# Altium PCB SewingAutoExt.PcbDoc
Units mm, origin at the board's own origin, x right, y up, seen from the top; angles counter-clockwise.
Board outline 60 x 53.47 mm, 2 copper layers (Top Layer, Bottom Layer); 58 components, 69 nets, 189 pads, 31 vias.
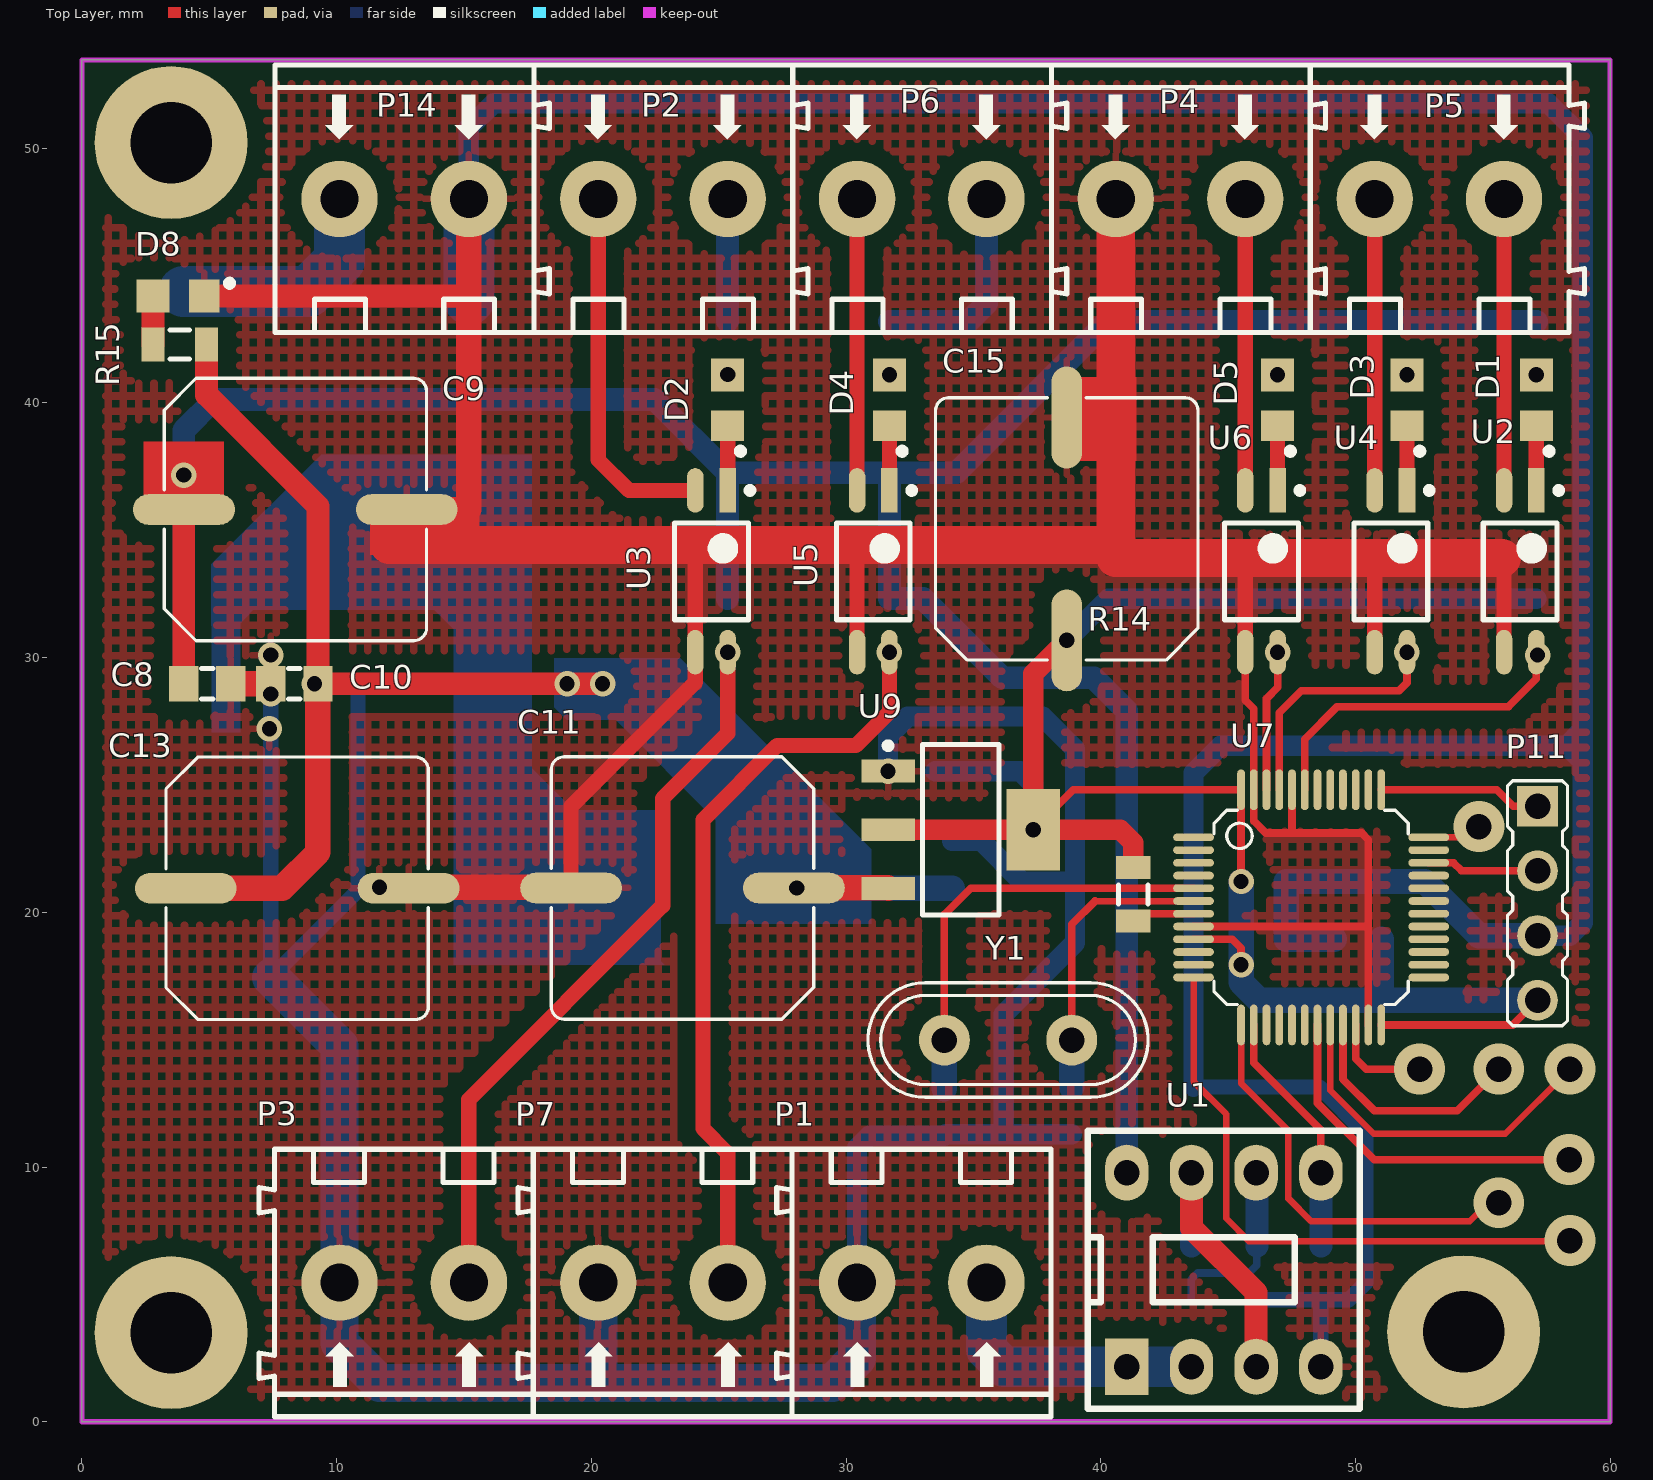
[diagram p0: Top Layer view]
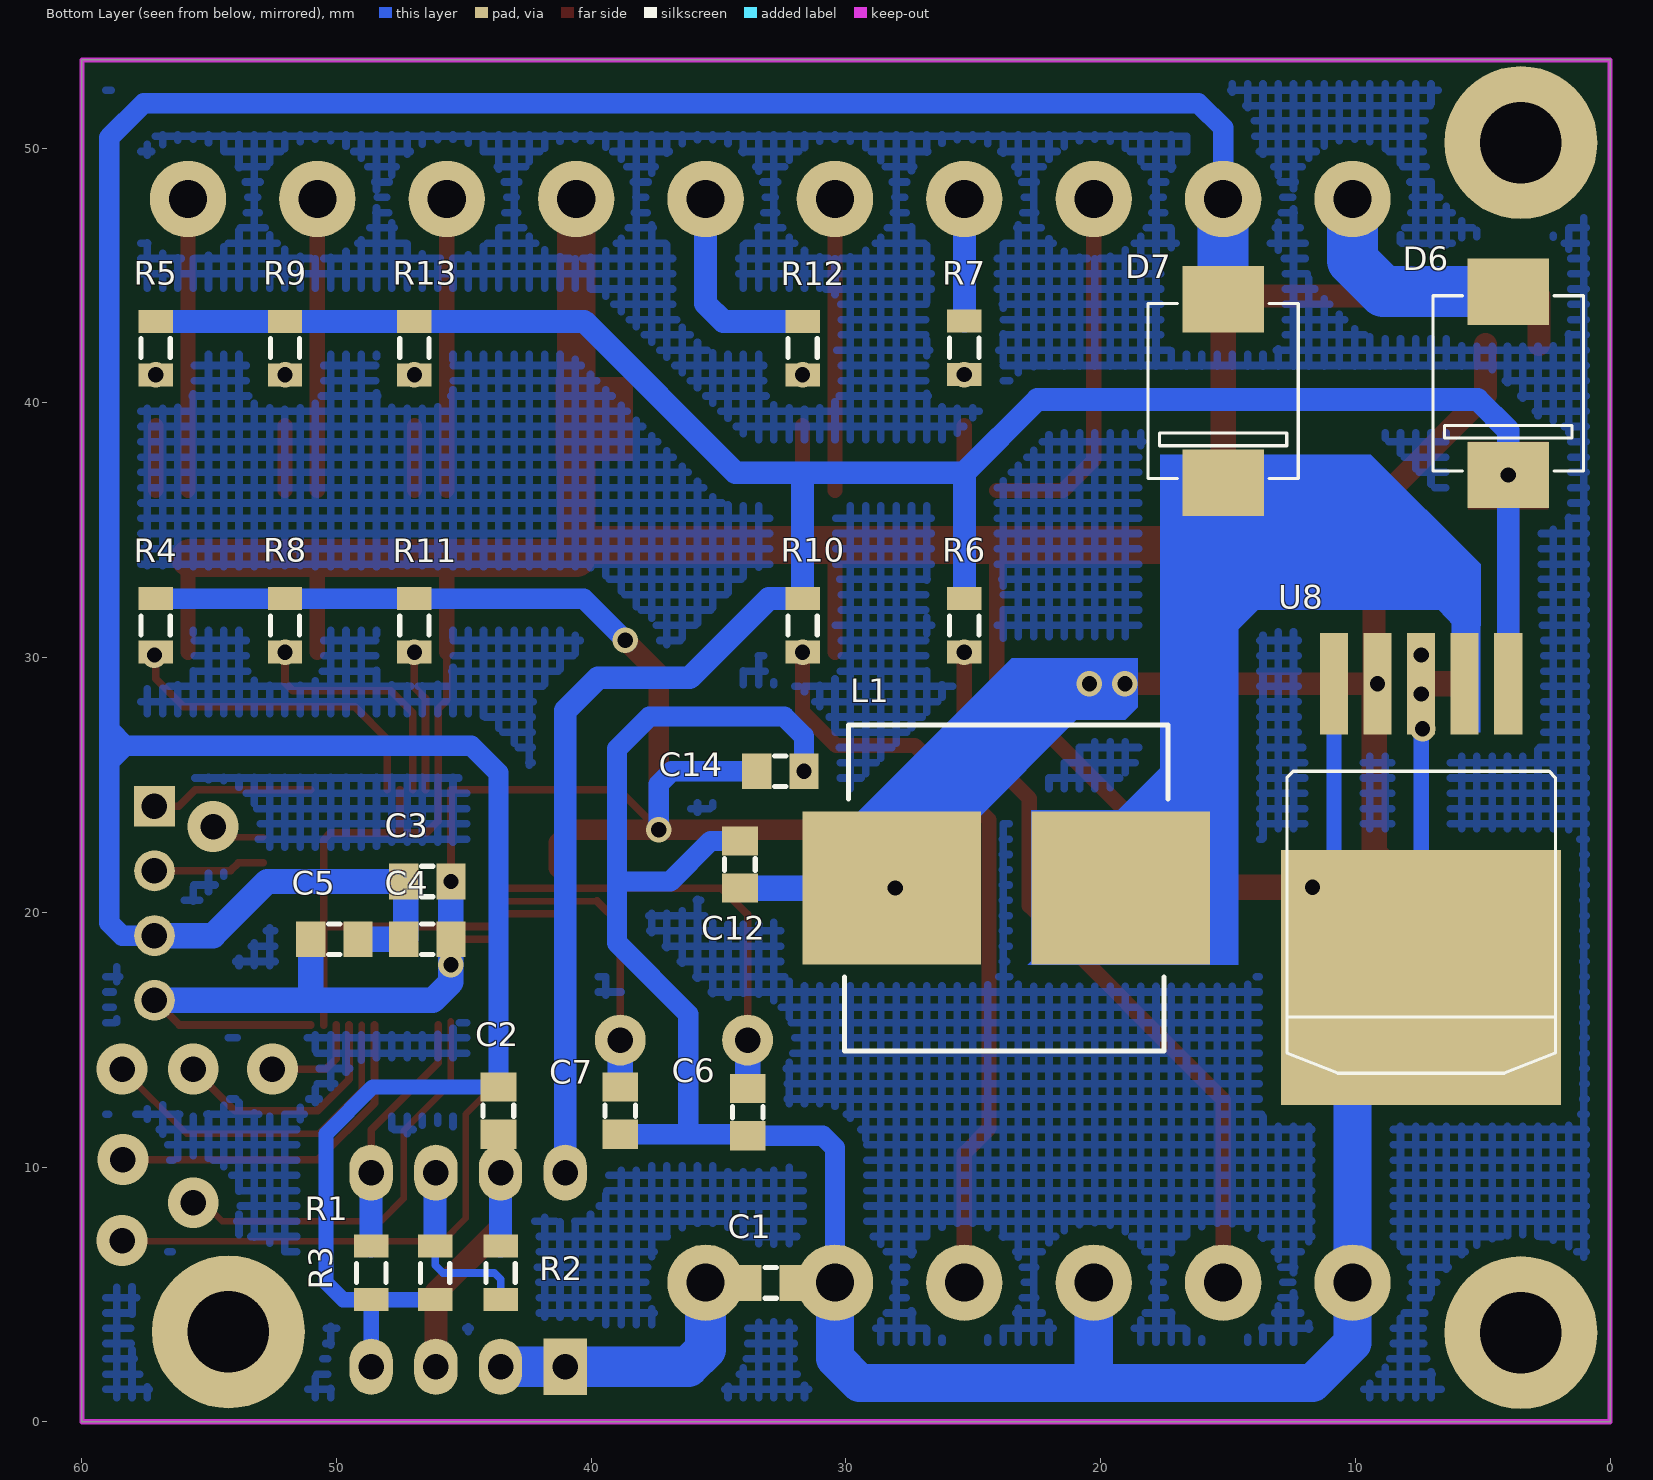
[diagram p1: Bottom Layer view, seen from below]
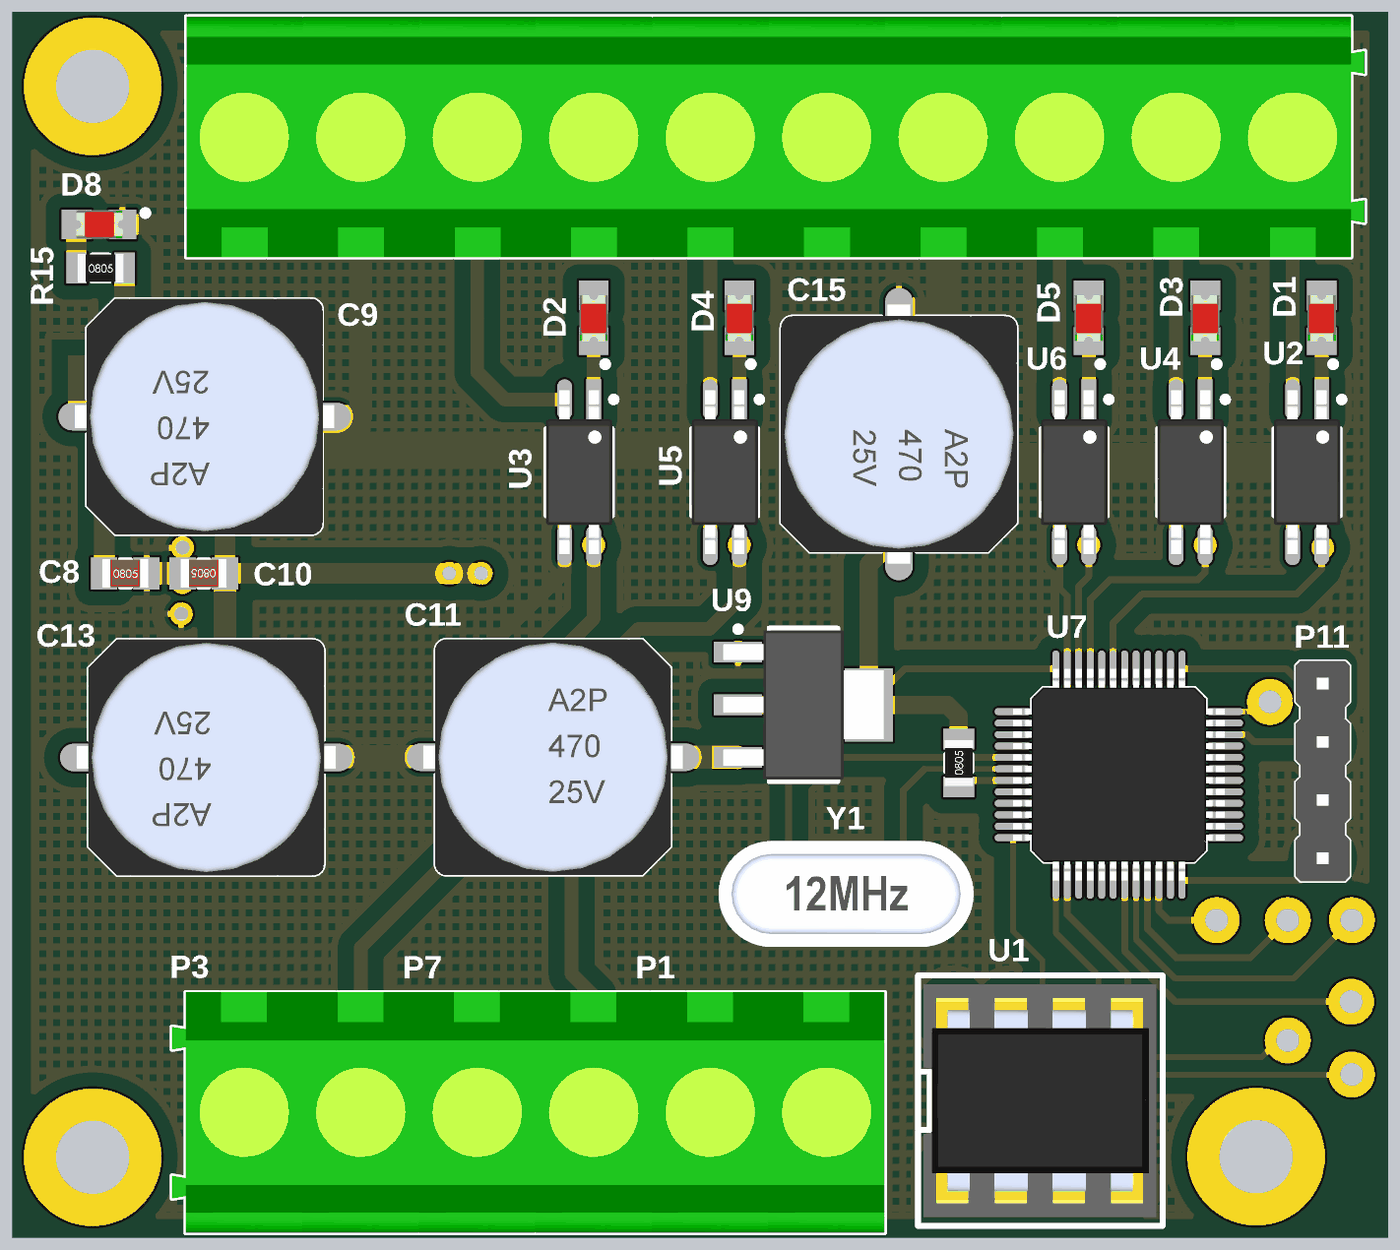
[diagram p2: 3D render of the assembled board from above, using the file's embedded part models]
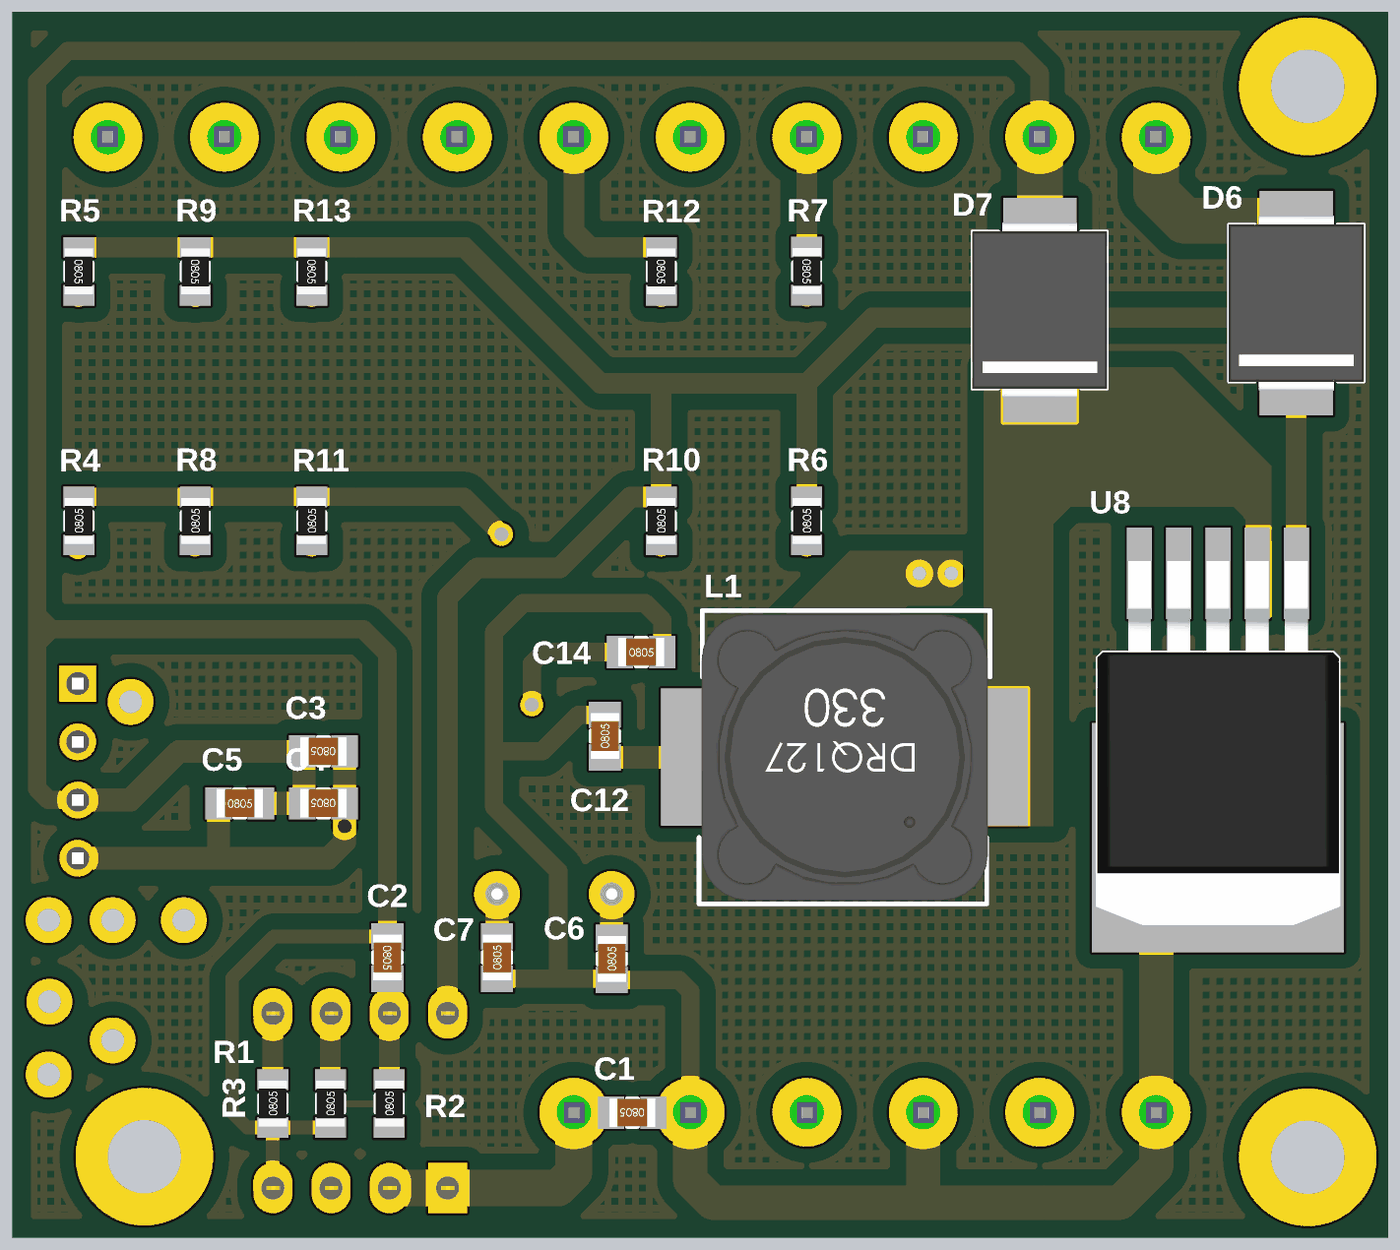
[diagram p3: 3D render of the assembled board from below, using the file's embedded part models]

## Layer stack, top to bottom
Top Solder: solder mask 0.0102, Solder Resist, Dk 3.5
Top Layer: signal copper 0.0356
Dielectric 1: dielectric 0.32, FR-4, Dk 4.8
Bottom Layer: signal copper 0.0356
Bottom Solder: solder mask 0.0102, Solder Resist, Dk 3.5

## Board outline
0,0 60,0 60,53.467 0,53.467

## Design rules (kind name [scope] priority, off if disabled: settings)
Clearance [All] p1: gap=0.2 ignorepadtopadclearanceinfootprint=FALSE
ComponentClearance [All] p1 off: gap=0.254 collisioncheckmode=3 verticalgap=0.254 showdistances=FALSE
HoleSize [All] p1 off: absolutevalues=TRUE maxlimit=2.54 minlimit=0.025 maxpercent=80.000 minpercent=20.000
HoleToHoleClearance [All] p1 off: gap=0.254 allowstackedmicrovias=TRUE
LayerPairs [All] p1 off: enforce=TRUE
MinimumSolderMaskSliver [All] p1 off: minsoldermaskwidth=0.254
PolygonConnect [All] p1: connectstyle=Relief reliefconductorwidth=0.254 reliefentries=4 polygonreliefangle="90 Angle" airgapwidth=0.254
RoomDefinition DACAmplification [InComponentClass('DACAmplification')] p1: confinementstyle=ConfineIn formatcopy=TRUE lockcomponents=FALSE outline 0,53.467 60,53.467 60,0 0,0
RoomDefinition PowerSupply [InComponentClass('PowerSupply')] p2: confinementstyle=ConfineIn formatcopy=TRUE lockcomponents=FALSE outline 0,0 60,0 60,53.467 0,53.467
RoomDefinition InputLevelShifter [InComponentClass('InputLevelShifter')] p3: confinementstyle=ConfineIn formatcopy=TRUE lockcomponents=FALSE outline 0,0 60,0 60,53.467 0,53.467
RoomDefinition MCU [InComponentClass('MCU')] p4: confinementstyle=ConfineIn formatcopy=TRUE lockcomponents=FALSE outline 0,0 60,0 60,53.467 0,53.467
RoutingVias [All] p1: holewidth=0.6 width=1 viastyle="Through Hole" minholewidth=0.6 minwidth=1 maxholewidth=0.6 maxwidth=1
SilkToSilkClearance [All] p1 off: silktosilkclearance=0.254
SilkToSolderMaskClearance [IsPad] p1 off: minsilkscreentomaskgap=0.254 clearancetoexposedcopper=TRUE
SolderMaskExpansion [All] p1: expansion=0.102
Width [All] p1: maxlimit=2 minlimit=0.254 preferedwidth=1
23 further rules are at their usual default settings.

## Classes and differential pairs
component class PowerSupply: C8 C9 C10 C11 C12 C13 C14 C15 D6 D7 D8 L1 P14 R15 U8 U9
component class MCU: C3 C4 C5 C6 C7 P11 R14 U7 Y1
component class InputLevelShifter: D1 D2 D3 D4 D5 P2 P3 P4 P5 P6 P7 R4 R5 R6 R7 R8 R9 R10 R11 R12 R13 U2 U3 U4 U5 U6
component class DACAmplification: C1 C2 P1 R1 R2 R3 U1

## Components (designator, comment, footprint, x,y, rotation, side; value= is the part's Value field where it differs from the comment)
C1 "104" C-0805 32.96,5.447 r0 bottom value=100nF
C2 "104" C-0805 43.644,12.216 r270 bottom value=100nF
C3 "104" C-0805 46.435,21.209 r0 bottom value=100nF
C4 "104" C-0805 46.435,18.943 r0 bottom value=100nF
C5 "104" C-0805 50.085,18.943 r180 bottom value=100nF
C6 "22" C-0805 33.862,12.156 r90 bottom value=22pF
C7 "22" C-0805 38.862,12.216 r90 bottom value=22pF
C8 "104" C-0805 4.925,28.974 r0 top value=100nF
C9 "330uF/50V" C-ALU-10x10.2mm 8.382,35.814 r270 top value=330uF
C10 "104" C-0805 8.345,28.974 r180 top value=100nF
C11 "330uF/50V" C-ALU-10x10.2mm 23.581,20.955 r90 top value=330uF
C12 "104" C-0805 34.163,21.876 r90 bottom value=100nF
C13 "330uF/50V" C-ALU-10x10.2mm 8.453,20.943 r270 top value=330uF
C14 "104" C-0805 32.575,25.541 r180 bottom value=100nF
C15 "330uF/50V" C-ALU-10x10.2mm 38.668,35.052 r0 top value=330uF
D1 "SMD0805-RED" LED-0805 57.104,40.102 r90 top value=StatusLed
D2 "SMD0805-RED" LED-0805 25.354,40.102 r90 top value=StatusLed
D3 "SMD0805-RED" LED-0805 52.024,40.102 r90 top value=StatusLed
D4 "SMD0805-RED" LED-0805 31.704,40.102 r90 top value=StatusLed
D5 "SMD0805-RED" LED-0805 46.944,40.102 r90 top value=StatusLed
D6 "SS54-SMA" D-DO214-AB 4,40.767 r270 bottom value=SS54
D7 "SS54-SMA" D-DO214-AB 15.194,40.465 r270 bottom value=SS54
D8 "SMD0805-RED" LED-0805 3.797,44.196 r180 top value=PowerLed
L1 "100mH/3A" L-SMD-12.5x12.5 23.708,20.955 r0 bottom value=100mH
P1 "KF128-2P" TER-KF128-2P 32.96,5.447 r0 top value="DAC OUT"
P2 "KF128-2P" TER-KF128-2P 22.828,48.02 r180 top value="Encoder IN"
P3 "KF128-2P" TER-KF128-2P 12.64,5.447 r0 top value="Encoder OUT"
P4 "KF128-2P" TER-KF128-2P 43.148,48.02 r180 top value="PLC IN"
P5 "KF128-2P" TER-KF128-2P 53.308,48.02 r180 top value="PLC IN"
P6 "KF128-2P" TER-KF128-2P 32.988,48.02 r180 top value="Encoder IN"
P7 "KF128-2P" TER-KF128-2P 22.8,5.447 r0 top value="Encoder OUT"
P11 "JP2.54-M-4P" JP2.54-M-1x04A 57.15,20.376 r270 top value=Programmer
P14 "KF128-2P" TER-KF128-2P 12.668,48.02 r180 top value="Power Supply"
R1 "1K" R-0805 46.13,5.842 r90 bottom
R2 "4K7" R-0805 43.561,5.842 r90 bottom
R3 "10K" R-0805 48.641,5.842 r90 bottom
R4 "4K7" R-0805 57.104,31.262 r90 bottom
R5 "6K8" R-0805 57.104,42.152 r270 bottom
R6 "10K" R-0805 25.354,31.262 r90 bottom
R7 "2K2" R-0805 25.354,42.162 r270 bottom
R8 "4K7" R-0805 52.024,31.262 r90 bottom
R9 "6K8" R-0805 52.024,42.152 r270 bottom
R10 "10K" R-0805 31.704,31.262 r90 bottom
R11 "4K7" R-0805 46.944,31.262 r90 bottom
R12 "2K2" R-0805 31.704,42.152 r270 bottom
R13 "6K8" R-0805 46.944,42.152 r270 bottom
R14 "10K" R-0805 41.275,20.701 r90 top
R15 "1K5" R-0805 3.846,42.291 r0 top
U1 "LM358" SK-DIP8-300 44.831,5.969 r0 top value=TL082
U2 "EL3H7" SSOP-4 56.469,33.387 r270 top
U3 "EL3H7" SSOP-4 24.719,33.387 r270 top
U4 "EL3H7" SSOP-4 51.389,33.387 r270 top
U5 "EL3H7" SSOP-4 31.069,33.387 r270 top
U6 "EL3H7" SSOP-4 46.309,33.387 r270 top
U7 "STM32F051C8" LQFP-48 48.26,20.193 r270 top
U8 "LM2576S-5" TO-263-5L 7.42,23.208 r0 bottom
U9 "LM1117-3.3" SOT-223-3 34.5,23.241 r0 top
Y1 "8MHz" XTAL-49S 36.362,14.986 r0 top

## Footprints (in the part's own frame and the unit in brackets; to place one, negate y for a bottom-side part, rotate by r counter-clockwise, add the part's x,y. Pads: shape width x height; smd on the part's side, far side on the other; paste and mask are expansions set on the pad)
C-0805 [mm] "Chip Capacitor, 2-Leads, Body 2.0x1.3mm, IPC Medium Density"
  rect 1.15x1.4 smd: 1(-0.925,0) 2(0.925,0)
  silkscreen extent -0.22,-0.6 0.23,0.6, body extent -1,-0.62 1,0.63, height 0.5
C-ALU-10x10.2mm [mm] "C-10x10.2mm"
  oval 1.2x4 smd: 1(0,-4.374) 2(0,4.374)
  silkscreen extent -5.15,-5.15 5.15,5.15, body extent -5.15,-5.65 5.15,5.65, height 10.01
D-DO214-AB [mm]
  rect 2.6x3.2 smd: 1(-3.6,0) 2(3.6,0)
  silkscreen extent -3.44,-2.95 3.44,2.95, body extent -3.82,-2.95 3.81,2.95, height 2.4
JP2.54-M-1x04A [mm] "Jump luoc duc, 2.54mm, thang,"
  rect 1.6x1.6 hole 1: 1(-3.79,0)
  round 1.6 hole 1: 2(-1.25,0) 3(1.29,0) 4(3.83,0)
  silkscreen extent -4.79,-1.18 4.83,1.17, body extent -4.79,-1.17 4.83,1.18, height 7.75
L-SMD-12.5x12.5 [mm] "DRQ127"
  rect 7x6 smd: 1(-4.5,0) 2(4.5,0)
  silkscreen extent -6.34,-6.4 6.34,6.4, body extent -6.26,-6.24 6.24,6.26, height 8
LED-0805 [mm]
  rect 1.3x1.3 smd: 1(1,0)
  rect 1.2x1.3 smd: 2(-1,0)
  silkscreen extent -2.13,-0.63 -1.87,-0.37, body extent -1.01,-0.62 1.01,0.63, height 1.1
LQFP-48 [mm]
  oval 0.3x1.6 smd: 1(-2.75,-4.616) 2(-2.25,-4.616) 3(-1.75,-4.616) 4(-1.25,-4.616) 5(-0.75,-4.616) 6(-0.25,-4.616) 7(0.25,-4.616) 8(0.75,-4.616) 9(1.25,-4.616) 10(1.75,-4.616) 11(2.25,-4.616) 12(2.75,-4.616) 25(2.75,4.616) 26(2.25,4.616) 27(1.75,4.616) 28(1.25,4.616) 29(0.75,4.616) 30(0.25,4.616) 31(-0.25,4.616) 32(-0.75,4.616) 33(-1.25,4.616) 34(-1.75,4.616) 35(-2.25,4.616) 36(-2.75,4.616)
  oval 1.6x0.3 smd: 13(4.616,-2.75) 14(4.616,-2.25) 15(4.616,-1.75) 16(4.616,-1.25) 17(4.616,-0.75) 18(4.616,-0.25) 19(4.616,0.25) 20(4.616,0.75) 21(4.616,1.25) 22(4.616,1.75) 23(4.616,2.25) 24(4.616,2.75) 37(-4.616,2.75) 38(-4.616,2.25) 39(-4.616,1.75) 40(-4.616,1.25) 41(-4.616,0.75) 42(-4.616,0.25) 43(-4.616,-0.25) 44(-4.616,-0.75) 45(-4.616,-1.25) 46(-4.616,-1.75) 47(-4.616,-2.25) 48(-4.616,-2.75)
  Top Layer lines w0.254: -0.25,-4.616 -0.25,-4.616 ; 4.616,0.75 4.616,0.75
  silkscreen extent -3.81,-3.81 3.81,3.81, body extent -4.62,-4.62 4.62,4.62, height 1.53
R-0805 [mm] "Chip Resistor, 2-Leads, Body 2.0x1.3mm, IPC Medium Density"
  rect 0.9x1.35 smd: 1(-1.05,0) 2(1.05,0)
  silkscreen extent -0.38,-0.58 0.38,0.58, body extent -1,-0.62 1,0.63, height 0.5
SK-DIP8-300 [mm] "Socket DIP8 pin to pin 300mil"
  rect 1.7x2.2 hole 1: 1(-3.81,-3.81)
  oval 1.7x2.2 hole 1: 2(-1.27,-3.81) 3(1.27,-3.81) 4(3.81,-3.81) 5(3.81,3.81) 6(1.27,3.81) 7(-1.27,3.81) 8(-3.81,3.81)
  silkscreen extent -5.33,-5.46 5.33,5.46, body extent -5.1,-5.08 5.06,5.08, height 7.5
SOT-223-3 [mm]
  rect 2.1x0.9 smd: 1(-2.85,2.3) 2(-2.85,0) 3(-2.85,-2.3)
  rect 2.1x3.2 smd: 2(2.85,0)
  silkscreen extent -2.97,-3.35 1.5,3.42, body extent -3.5,-3.25 3.5,3.25, height 1.7
SSOP-4 [mm] "SOIC, 4-Leads, Body 2.80x4.50mm, Pitch 1.27mm, IPC Medium Density"
  rect 1.75x0.65 smd: 1(-3.175,0.635)
  oval 1.75x0.65 smd: 2(-3.175,-0.635) 3(3.175,-0.635) 4(3.175,0.635)
  silkscreen extent -3.3,-1.45 1.9,1.64, body extent -3.57,-1.45 3.58,1.45, height 2
TER-KF128-2P [mm] "TERMINAL 3 KF128-2P 5.08MM"
  round 3 hole 1.5: 1(-2.526,0.014) 2(2.554,0.014)
  silkscreen extent -5.68,-5.25 5.08,5.25, body extent -5.68,-5.25 5.08,5.25, height 14.35
TO-263-5L [mm]
  rect 1.1x4 smd: 1(-3.42,-5.765) 2(-1.71,-5.765) 3(0,-5.765) 4(1.71,-5.765) 5(3.42,-5.765)
  rect 11x10 smd: HM(0,5.765)
  silkscreen extent -5.27,-2.33 5.27,9.52, body extent -5.27,-6.3 5.27,9.52, height 4.95
XTAL-49S [mm] "Length 400mil - Width 200mil"
  round 2 hole 1: 1(-2.5,0) 2(2.5,0)
  silkscreen extent -5.5,-2.25 5.5,2.25, body extent -5.5,-2.25 5.5,2.25, height 4

## Part data
C1 C2 C3 C4 C5 C6 C7 C8 C10 C12 C14: library part Cap, "Capacitor", LatestRevisionDate=17-Jul-2002, LatestRevisionNote="Re-released for DXP Platform.", PackageReference=RAD-0.3, Published=8-Jun-2000, Publisher="Altium Limited"
  C1 C2 C6 C7: PackageDescription="Radial Cap, Thru-Hole; 2 Leads; 0.3 in Pin Spacing"
C9 C11 C13 C15: library part Cap2, "100UF 50V 10x10.2MM", PackageReference=CAPR5-4X5, Published=23-Sep-2002, Publisher="Altium Limited"
D1 D2 D3 D4 D5 D8: library part LED0, "Typical INFRARED GaAs LED", LatestRevisionDate=08-Jul-2005, LatestRevisionNote="Mech Layer 1 removed.", PackageReference=LED-0, Published=8-Jun-2000
D6 D7: library part "Diode 1N4004", "1 Amp General Purpose Rectifier", PackageDocument=Aug-1999, Code_JEDEC=DO-204-AL, ComponentLink1Description="Manufacturer Link", ComponentLink1URL=http://www.fairchildsemi.com/, ComponentLink2Description=Datasheet, ComponentLink2URL=http://www.fairchildsemi.com/ds/1N%2F1N4001.pdf, DatasheetDocument=1998, LatestRevisionDate=17-Jul-2002, LatestRevisionNote="Re-released for DXP Platform.", PackageReference=DO-41, Published=8-Jun-2000
L1: library part "Inductor Iron", "Magnetic-Core Inductor", LatestRevisionDate=17-Jul-2002, LatestRevisionNote="Re-released for DXP Platform.", PackageDescription="Axial Device, Thru-Hole; 2 Leads; 0.9 in Pin Spacing", PackageReference=AXIAL-0.9, Published=24-Mar-1999, Publisher="Altium Limited"
P1 P2 P3 P4 P5 P6 P7 P14: library part "Header 2", "Header, 2-Pin", LatestRevisionDate=17-Jul-2002, LatestRevisionNote="Re-released for DXP Platform."
P11: library part "Header 4", "Header, 4-Pin", LatestRevisionDate=17-Jul-2002, LatestRevisionNote="Re-released for DXP Platform."
R1 R2 R3 R4 R5 R6 R7 R8 R9 R10 R11 R12 R13 R14 R15: library part Res1, "Resistor", LatestRevisionDate=17-Jul-2002, LatestRevisionNote="Re-released for DXP Platform.", PackageDescription="Axial Device, Thru-Hole; 2 Leads; 0.3 in Pin Spacing", PackageReference=AXIAL-0.3, Published=8-Jun-2000, Publisher="Altium Limited"
U1: library part TL082D, "JFET-Input Operational Amplifier", Code_IPC=SOIC127P600-8, ComponentLink1Description="Manufacturer Link", ComponentLink1URL=http://www.ti.com/, ComponentLink2Description=Datasheet, ComponentLink2URL=http://www-s.ti.com/sc/ds/tl082.pdf, DatasheetVersion=Feb-1999, LatestRevisionDate=13-Apr-2006, LatestRevisionNote="IPC-7351 Footprint Added.", PackageDescription="8-Pin Small Outline Integrated Circuit 1.27 mm Pitch", PackageReference=D008, PackageVersion=Jan-1998, Published=16-Jan-2001, Publisher="Altium Limited"
U2 U3 U4 U5 U6: library part Optoisolator1, "4-Pin Phototransistor Optocoupler", DatasheetDocument=Nov-2003, LatestRevisionDate=04-Mar-2005, LatestRevisionNote="Sch pins 3 & 4 Swapped.", PackageReference=DIP-4, Published=24-Mar-1999
U7: "Core: ARM® 32-bit Cortex® -M0 CPU, frequency up to 48 MHz"
U8: library part LM2576S-5.0, "Simple Switcher 3A Step Down Voltage Regulator", ComponentLink1Description="Manufacturer Link", ComponentLink1URL=http://www.national.com/, ComponentLink2Description=Datasheet, ComponentLink2URL=http://www.national.com/ds.cgi/LM/LM2576.pdf, ComponentLink3Description="URL Link1", ComponentLink3URL=http://www.national.com/pf/LM/LM2576.html, DatasheetVersion=Jun-1999, Note="Tab is connected to GND", PackageDescription="D2-PAK; 5 Leads; Body 14.4 (inc. leads) x 10.4 mm (LxW max)", PackageReference=TS5B, Published=15-Apr-2002, Publisher="Altium Limited"
U9: library part LM1117DT-3.3, "800mA Low-Dropout Linear Regulator, 3-pin TO-252", Manufacturer="National Semiconductor", PackageTopMarking=NSUZXYTT*LM1117*DT-3.3, PowerWise=N, Supplier Part Number 1=9486275, Code_JEDEC=TO-252-AA, ComponentLink1Description="LM1117 Datasheet", ComponentLink1URL=http://www.national.com/ds/LM/LM1117.pdf, ComponentLink2Description="LM1117 Web Page", ComponentLink2URL=http://www.national.com/pf/LM/LM1117.html, ComponentLink3Description="TD03B Package Page", ComponentLink3URL=http://www.national.com/packaging/folders/td03b.html, CompType="LDO IC", DatasheetVersion=Apr-2006, PackageDescription="TO252, Molded, Jedec, 6.8 x 6.10 x 2.30mm Body, 3 Lead, 2.28mm Pitch, Surface Mount", PackageReference=TD03B, PackageVersion="revD, Feb-2009", PartNumber=LM1117DT-3.3, PinCount=3, Published=4-Dec-2008, Publisher="Altium Limited", RoHS=N, Supplier 1=Farnell, Supplier 2=Farnell, Supplier Part Number 2=1523829
Y1: library part XTAL, "Crystal Oscillator", LatestRevisionDate=17-Jul-2002, LatestRevisionNote="Re-released for DXP Platform.", PackageDescription="Crystal, Thru-Hole; 2 Leads; Body 3.1 x 8.2 mm (Dia.xH)", PackageReference=R38, Published=8-Jun-2000

## Free pads (board coordinates)
  round 6 hole 3.2: H(3.5,3.5) H(3.5,50.221) H(54.245,3.524)

## Via types
v1: diameter 1, hole 0.6, Top Layer to Bottom Layer, 24 vias
v2: diameter 2, hole 1, Top Layer to Bottom Layer, 7 vias

## Nets (pads, with @x,y where several pads share a name; then routed paths per layer and width w, separated by ;. In a path a pad name is that pad's centre, name@x,y a point inside that pad or via, vN(x,y) a via of type N, cw(c..) or ccw(c..) an arc to the next point about the centre after c; other vN are vias at no path point)
+3V3: C3.1 C4.1 C5.1 C14.1 C15.1 P11.4 R4.2 R8.2 R11.2 R14.2 U7.9 U7.24 U7.48 U9.2 | length 83.7
  Top Layer w0.3: v1(37.35,23.241) 38.918,24.809 U7.48 v1(45.51,21.209) ; U7.9 45.161,18.943 45.51,18.594 v1(45.51,17.943) ; U7.24 56.181,15.577 P11.4
  Top Layer w0.8: U9.2@31.65,23.241 v1(37.35,23.241) ; v1(38.668,30.678) 37.35,29.361 v1(37.35,23.241) ; R14.2 41.275,22.733 40.767,23.241 v1(37.35,23.241)
  Bottom Layer w0.8: C14.1 36.838,25.541 37.35,25.029 v1(37.35,23.241) ; v1(38.668,30.678) 40.302,32.312 R11.2 R8.2 R4.2
  Bottom Layer w1: v1(45.51,21.209) C4.1 v1(45.51,17.943) 45.51,17.257 46.221,16.546 51.01,16.546 ; C5.1 51.01,16.546 ; P11.4 51.01,16.546
+5V: C10.1 C11.1 C12.1 C13.1 L1.2 R15.2 U8.4 U9.3 | length 61.4
  Top Layer w0.9: R15.2 4.896,40.316 9.27,35.942 C10.1 v1(19.05,28.974) v1(20.443,28.974)
  Top Layer w1: C13.1 7.862,20.943 9.27,22.351 C10.1 ; C11.1 v1(28.067,20.955) 31.636,20.955 U9.3
  Bottom Layer w1: v1(20.443,28.974) 20.459,28.958 23.239,28.958 25.874,26.323 25.874,22.767 27.686,20.955 v1(28.067,20.955) ; L1.2 28.212,20.951 C12.1
  other v1: 9.13,28.974
+24V: C8.1 C9.1 D6.2 R5.1 R6.2 R9.1 R10.2 R13.1 U1.8 U8.1 | length 113.2
  Top Layer w0.9: C8.1 C9.1@4,35.806
  Bottom Layer w0.9: U8.1 v1(4,37.167) 4,38.925 5.207,40.132 22.479,40.132 25.354,37.257 ; R6.2 25.354,37.257 ; U1.8 41.021,27.918 39.729,29.21 36.135,29.21 33.033,32.312 R10.2 31.704,37.176 31.623,37.257 ; R5.1 R9.1 R13.1 40.281,43.202 34.336,37.257 31.623,37.257 ; 25.354,37.257 31.623,37.257
DAC: R3.2 U1.5 U7.14 | length 9.8
  Top Layer w0.3: U7.14 46.01,14.09 48.641,11.459 U1.5
  Bottom Layer w0.9: R3.2 U1.5
ENA: P3.2 R6.1 U3.4 | length 29
  Top Layer w0.6: P3.2 15.194,12.654 22.8,20.26 22.8,24.464 25.354,27.018 v1(25.354,30.212)
ENA+: P2.1 R7.1 | length 4.8
  Bottom Layer w0.9: R7.1 P2.1
ENA-: P2.2 U3.2 | length 14.5
  Top Layer w0.6: P2.2 20.274,37.765 21.477,36.562 U3.2
ENB: P7.2 R10.1 U5.4 | length 30
  Top Layer w0.6: P7.2 25.354,10.541 24.384,11.511 24.384,23.63 27.299,26.545 30.386,26.545 31.704,27.863 U5.4
  other v1: 31.706,30.212
ENB+: P6.1 R12.1 | length 8.2
  Bottom Layer w0.9: R12.1 34.82,43.202 35.514,43.896 P6.1
ENB-: P6.2 U5.2 | length 11.4
  Top Layer w0.6: U5.2 P6.2
GND: C1.1 C2.1 C3.2 C4.2 C5.2 C6.1 C7.1 C8.2 C9.2 C10.2 C11.2 C12.2 C13.2 C14.2 C15.2 D7.1 D8.2 P1.1 P3.1 P4.2 P7.1 P11.3 P14.1 R1.1 R3.1 U1.4 U2.3 U3.3 U4.3 U5.3 U6.3 U7.8 U7.23 U7.44 U7.47 U8.3 U8.5 U8.HM U9.1 | length 410.9
  Top Layer w0.3: U7.8 50.51,19.443 ; U6.3 45.674,28.321 46.01,27.985 U7.47 46.01,23.586 46.482,23.114 47.51,23.114 ; U7.44 47.51,23.114 ; U7.23 50.51,19.443 ; 47.51,23.114 50.248,23.114 50.51,22.852 50.51,19.443
  Top Layer w0.6: C11.2@19.196,20.943 C11.2 19.208,24.161 24.084,29.037 U3.3 24.084,33.782 ; U5.3 30.434,33.782 ; U6.3 45.674,33.863 45.72,33.909 ; U4.3 50.754,33.863 50.8,33.909 ; U2.3 55.834,33.909
  Top Layer w0.9: D8.2 15.068,44.196 15.194,44.07
  Top Layer w1: C8.2 C10.2 ; v1(11.684,20.983) 19.156,20.983 C11.2@19.196,20.943 ; C9.2 15.194,35.814 15.194,44.07 P14.1
  Top Layer w1.5: 12.065,34.417 40.594,34.417 P4.2 ; 40.594,33.909 45.72,33.909 50.8,33.909 55.753,33.909
  Bottom Layer w0.6: U8.3 v1(7.42,28.575) U8.HM 10.84,20.863 U8.5 ; C6.1 C6.1@33.922,11.291 ; C2.1 48.581,13.141 50.419,11.303 50.419,5.461 49.75,4.792 R3.1 ; R1.1 R3.1 ; U1.4 R3.1
  Bottom Layer w0.8: P14.1 15.194,50.8 16.164,51.77 57.577,51.77 58.928,50.419 58.928,27.178 ; P1.1 30.434,10.749 30.916,11.231 C6.1 ; v1(31.65,25.541) 31.65,26.92 32.416,27.686 37.719,27.686 38.989,26.416 38.989,21.209 ; C6.1@33.922,11.291 36.195,11.291 ; C12.2 35.305,22.801 36.897,21.209 38.989,21.209 ; C7.1 36.195,11.291 ; C2.1 43.644,25.483 44.704,26.543 58.293,26.543 ; P11.3 58.42,19.086 58.928,19.594 58.928,25.908 ; 36.195,11.291 36.195,16.002 38.989,18.796 38.989,21.209 ; 58.293,26.543 58.928,25.908 ; 58.293,26.543 58.928,27.178 ; 58.928,25.908 58.928,27.178
  Bottom Layer w1: C5.2 C4.2 47.28,18.943 47.28,21.209 C3.2 52.725,21.209 54.848,19.086 P11.3
  Bottom Layer w1.5: U8.HM 10.114,14.749 P3.1 10.114,3.094 11.684,1.524 20.193,1.524 ; P7.1 20.274,1.605 20.193,1.524 ; P1.1 30.434,2.494 29.464,1.524 20.193,1.524
  Bottom Layer w2: D7.1 P14.1
  other v1: 7.366,27.209 7.42,30.099
I1: P5.1 U2.2 | length 11.4
  Top Layer w0.6: U2.2 P5.1
I2: P5.2 U4.2 | length 11.4
  Top Layer w0.6: U4.2 P5.2
I3: P4.1 U6.2 | length 11.4
  Top Layer w0.6: U6.2 P4.1
IN1: R4.1 U2.4 U7.43 | length 13.1
  Top Layer w0.3: U7.43 48.01,26.801 49.276,28.067 56.007,28.067 57.104,29.164 U2.4
  other v1: 57.15,30.099
IN2: R8.1 U4.4 U7.45 | length 9.7
  Top Layer w0.3: U7.45 47.01,27.833 47.879,28.702 51.71,28.702 52.024,29.016 v1(52.024,30.212)
IN3: R11.1 U6.4 U7.46 | length 5.6
  Top Layer w0.3: U7.46 46.51,28.395 46.944,28.829 v1(46.944,30.212)
IO1: U7.15
IO2: U7.16
IO3: U7.17
IO4: U7.18
IO5: U7.19 | length 13.9
  Top Layer w0.3: U7.19 48.51,12.513 50.736,10.287 v2(58.388,10.287)
IO6: U7.20 | length 14
  Top Layer w0.254: U7.20 49.01,13.011 50.718,11.303 55.88,11.303 v2(58.42,13.843) v2@58.42,14.09
IO7: U7.21 | length 9.8
  Top Layer w0.3: U7.21 49.51,13.454 50.748,12.216 53.999,12.216 v2(55.626,13.843) v2@55.88,14.097
IO8: U7.22 | length 4
  Top Layer w0.3: U7.22 50.01,14.255 50.422,13.843 v2(52.524,13.843)
IO9: U7.13 | length 16.7
  Top Layer w0.254: U7.13@45.51,15.723 U7.13 45.51,13.29 47.371,11.429 47.371,8.763 48.26,7.874 54.483,7.874 55.206,8.597 v2(55.626,8.597)
IO10: U7.12 | length 23.9
  Top Layer w0.254: U7.12 43.644,13.358 44.924,12.078 44.924,7.984 45.815,7.093 58.401,7.093 v2(58.42,7.112)
IO11: U7.11
IO12: U7.10
IO13: U7.36 | length 2.1
  Top Layer w0.254: U7.36 54.423,22.943 v2(54.848,23.368)
IO14: U7.35
IO15: U7.28
IO16: U7.27
IO17: U7.26
IO18: U7.25
IO19: U7.33
IO20: U7.32
IO21: U7.31
IO22: U7.30
IO23: U7.29
IO24: U7.42
IO25: U7.41
IO26: U7.40
IO27: U7.39
IO28: U7.3
IO29: U7.4
IO30: U7.2
IO31: U7.38
NetC2_2: C2.2 R2.2 U1.3 U1.7 | length 11.6
  Top Layer w0.9: U1.7 43.561,7.614 46.101,5.074 U1.3
  Bottom Layer w0.9: R2.2 U1.7
NetD1_1: D1.1 R5.2
  other v1: 57.104,41.102
NetD1_2: D1.2 U2.1 | length 2.5
  Top Layer w0.6: U2.1 D1.2
NetD2_1: D2.1 R7.2
  other v1: 25.354,41.112
NetD2_2: D2.2 U3.1 | length 2.5
  Top Layer w0.6: U3.1 D2.2
NetD3_1: D3.1 R9.2
  other v1: 52.024,41.102
NetD3_2: D3.2 U4.1 | length 2.5
  Top Layer w0.6: U4.1 D3.2
NetD4_1: D4.1 R12.2
  other v1: 31.704,41.102
NetD4_2: D4.2 U5.1 | length 2.5
  Top Layer w0.6: U5.1 D4.2
NetD5_1: D5.1 R13.2
  other v1: 46.944,41.102
NetD5_2: D5.2 U6.1 | length 2.5
  Top Layer w0.6: U6.1 D5.2
NetD7_2: D7.2 L1.1 U8.2 | length 32.8
  Bottom Layer w0.9: U8.2 5.71,33.142 9.433,36.865 D7.2 15.194,24.968 L1.1
NetD8_1: D8.1 R15.1 | length 1.9
  Top Layer w0.9: R15.1 D8.1
NetR1_2: R1.2 R2.1 U1.6 | length 7.2
  Bottom Layer w0.3: R2.1 43.561,5.588 43.815,5.842 45.823,5.842 46.13,6.149 R1.2
  Bottom Layer w0.9: U1.6 46.13,9.75 R1.2
PA: D6.1 P14.2 | length 9
  Bottom Layer w2: D6.1 8.895,44.367 10.114,45.586 P14.2
RST: R14.1 U7.7 | length 2.4
  Top Layer w0.3: R14.1@41.275,19.886 41.332,19.943 U7.7
SWCLK: P11.1 U7.37 | length 6.4
  Top Layer w0.3: U7.37 55.55,24.809 56.193,24.166 P11.1
SWDIO: P11.2 U7.34 | length 4.4
  Top Layer w0.3: U7.34 53.849,21.943 54.166,21.626 P11.2
VOUT1: C1.2 P1.2 U1.1 U1.2 | length 10.9
  Bottom Layer w1.6: P1.2 35.514,2.84 36.195,2.159 U1.1 U1.2
X1: C6.2 U7.5 Y1.1 | length 17
  Top Layer w0.3: Y1.1 33.862,19.912 34.893,20.943 U7.5
  Bottom Layer w1: C6.2 Y1.1
X2: C7.2 U7.6 Y1.2 | length 11.5
  Top Layer w0.254: 39.775,20.443 U7.6
  Top Layer w0.3: Y1.2 38.862,19.53 39.775,20.443
  Bottom Layer w1: C7.2 Y1.2
pads on no net: U7.1

## Polygon pours and split planes (outlines as drawn)
no net on Bottom Layer "Top Layer-No Net" (hatched 90Degree grid 0.6 track 0.3, remove dead copper, pour order 2): 0,53.34 59.873,53.34 60,53.467 60,0 0,0
GND on Top Layer "Top Layer-No Net" (hatched 90Degree grid 0.6 track 0.3, remove dead copper, pour order 0): 0,53.34 59.873,53.34 60,53.467 60,0 0,0

## Keep-outs
Keep-Out Layer:
  the board outline again, w0.2

## Other copper
Top Layer:
  rectangle net GND: 38.354,37.719 41.402,41.021
  rectangle net GND: 11.303,34.036 15.621,35.687
  rectangle net +24V: 2.413,35.806 5.588,38.481
Bottom Layer:
  rectangle net NetD7_2: 5.08,27.051 6.223,33.528
  region net +5V: 24.892,19.558 24.892,23.622 20.955,27.559 19.028,27.559 18.542,28.045 18.542,29.972 23.495,29.972 30.988,22.479 30.988,19.558
  region net NetD7_2: 6.139,31.242 6.72,31.877 13.843,31.877 14.605,31.115 14.605,17.943 22.86,17.943 22.733,18.07 22.733,24.003 19.304,24.003 17.653,25.654 17.653,37.973 9.398,37.973 5.08,33.655 5.08,31.242

## Silkscreen, mask and mechanical layers (free items; w line width, h text height)
Mechanical 15:
  lines w0.2: 10.114,3.51 10.114,48.006 ; 15.194,48.006 20.274,48.006 ; 25.354,5.461 30.434,5.461 ; 25.354,48.006 30.434,48.006 ; 35.514,48.006 40.594,48.006